# Altium PCB PCB2.PcbDoc
Units mil, origin at the board's own origin, x right, y up, seen from the top; angles counter-clockwise.
Board outline 1566.93 x 1488.19 mil, 4 copper layers (Top Layer, Int1 (GND), Int2 (PWR), Bottom Layer), stack 62.449 mil thick; 29 components, 72 nets, 189 pads, 109 vias.
Unrouted connection lines stored in the file: 2.
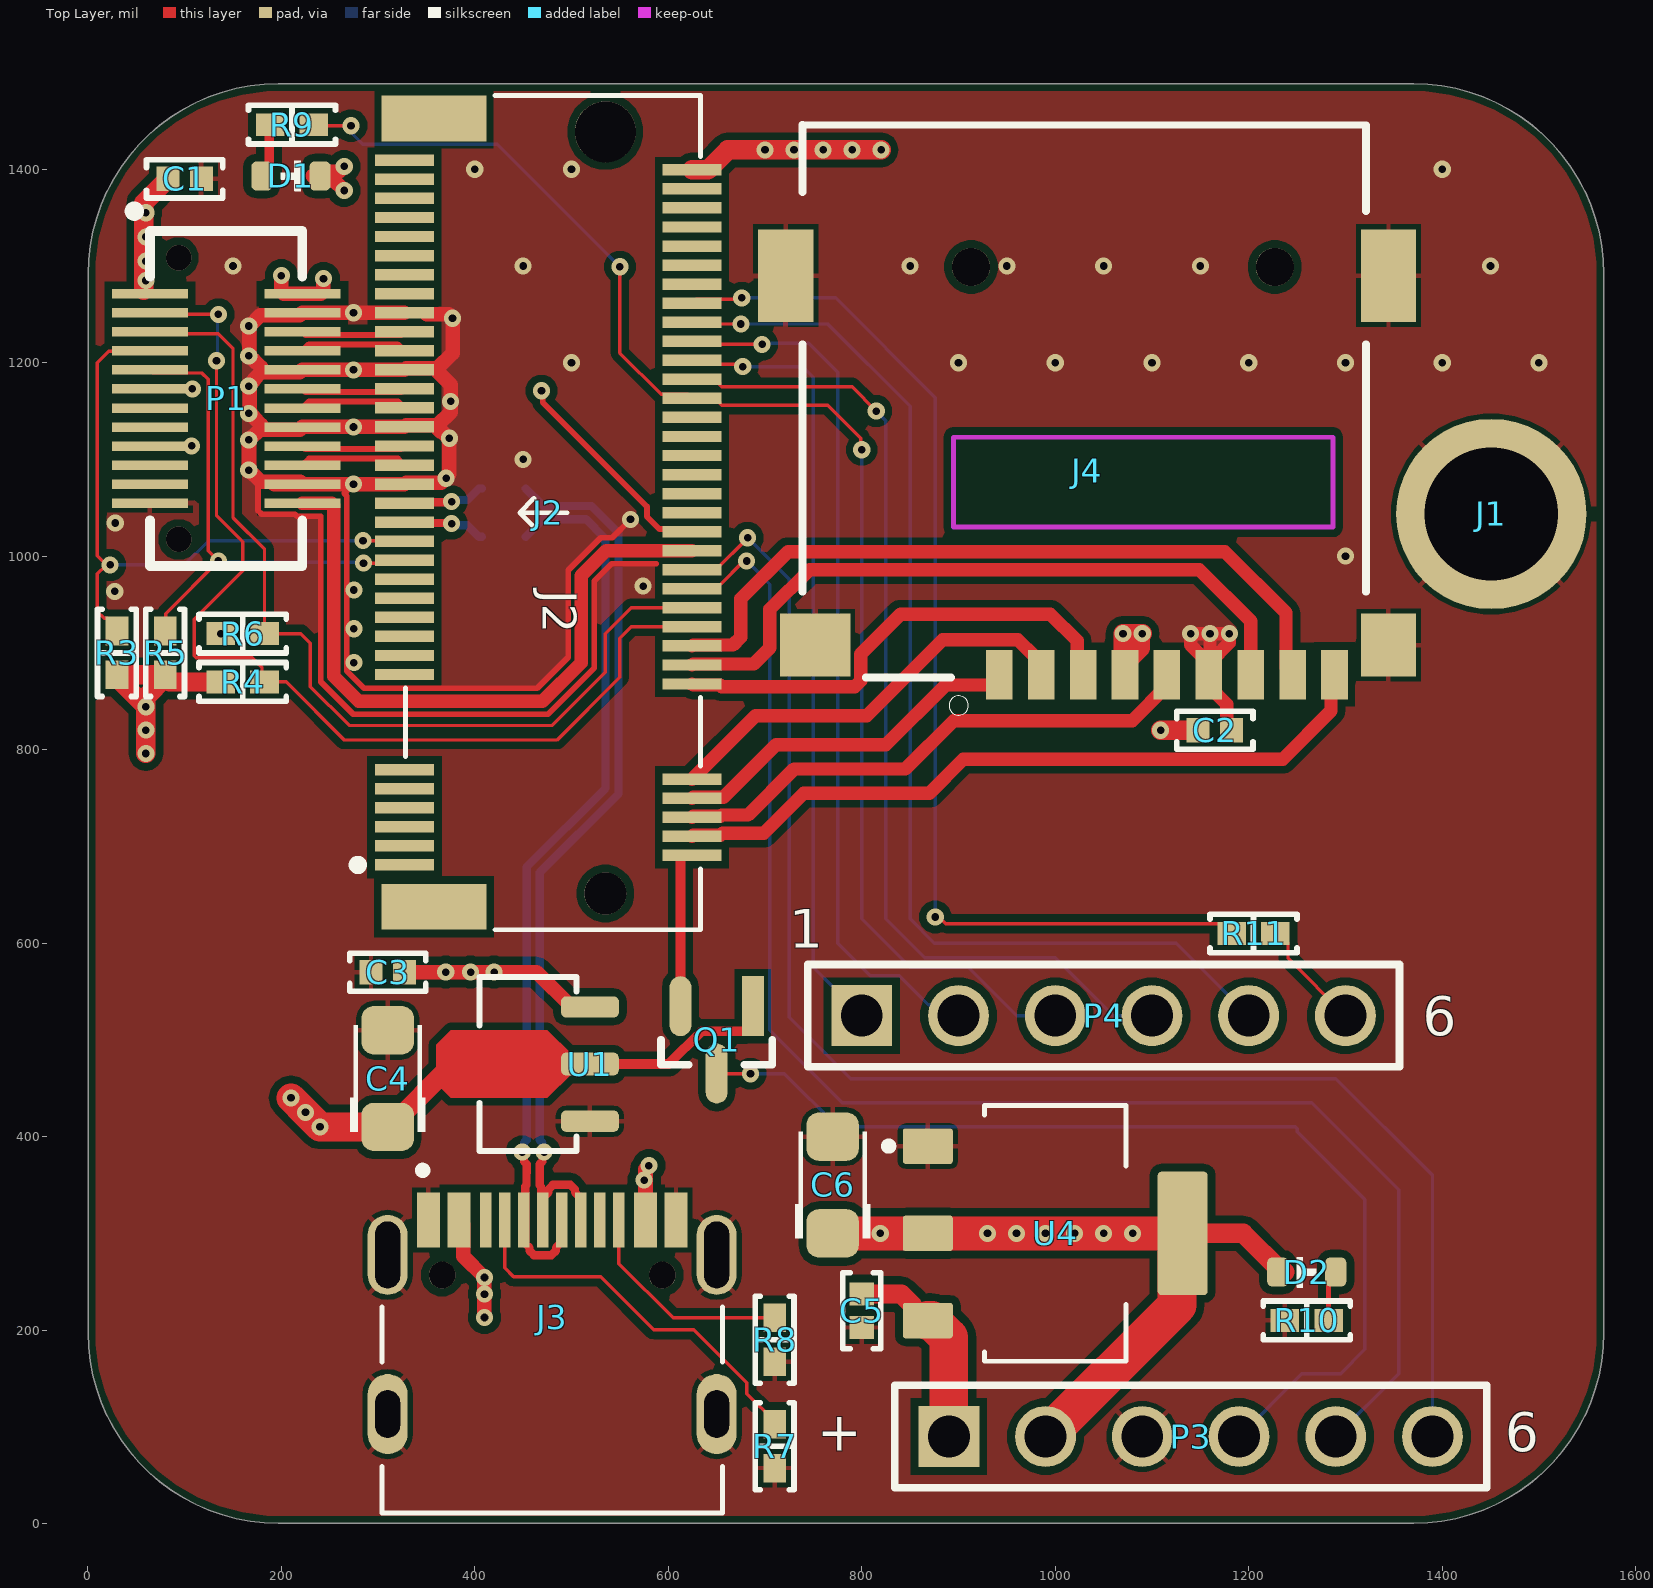
[diagram p0: Top Layer view]
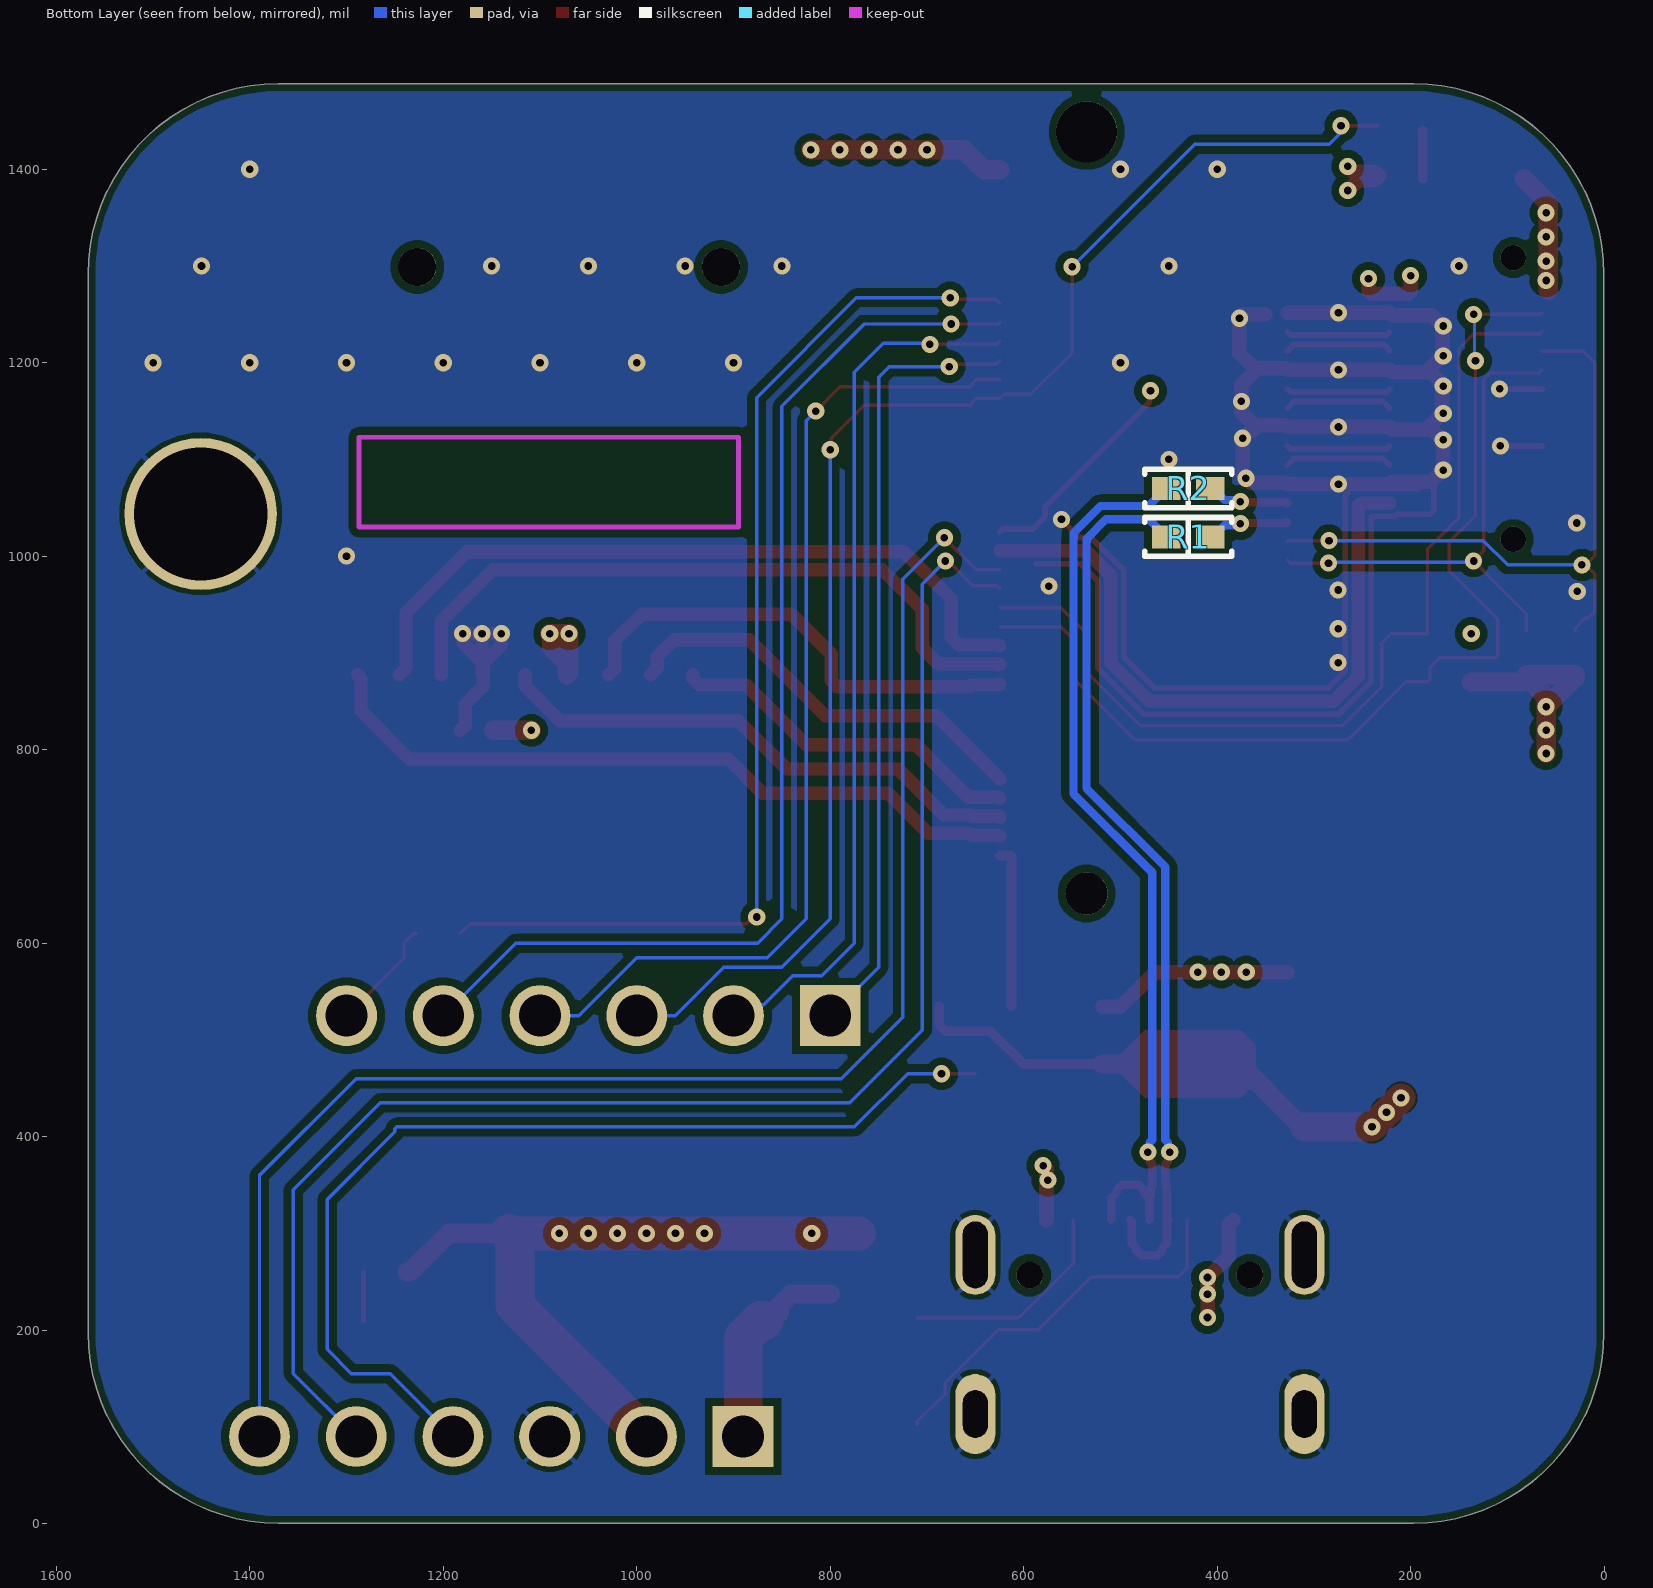
[diagram p1: Bottom Layer view, seen from below]
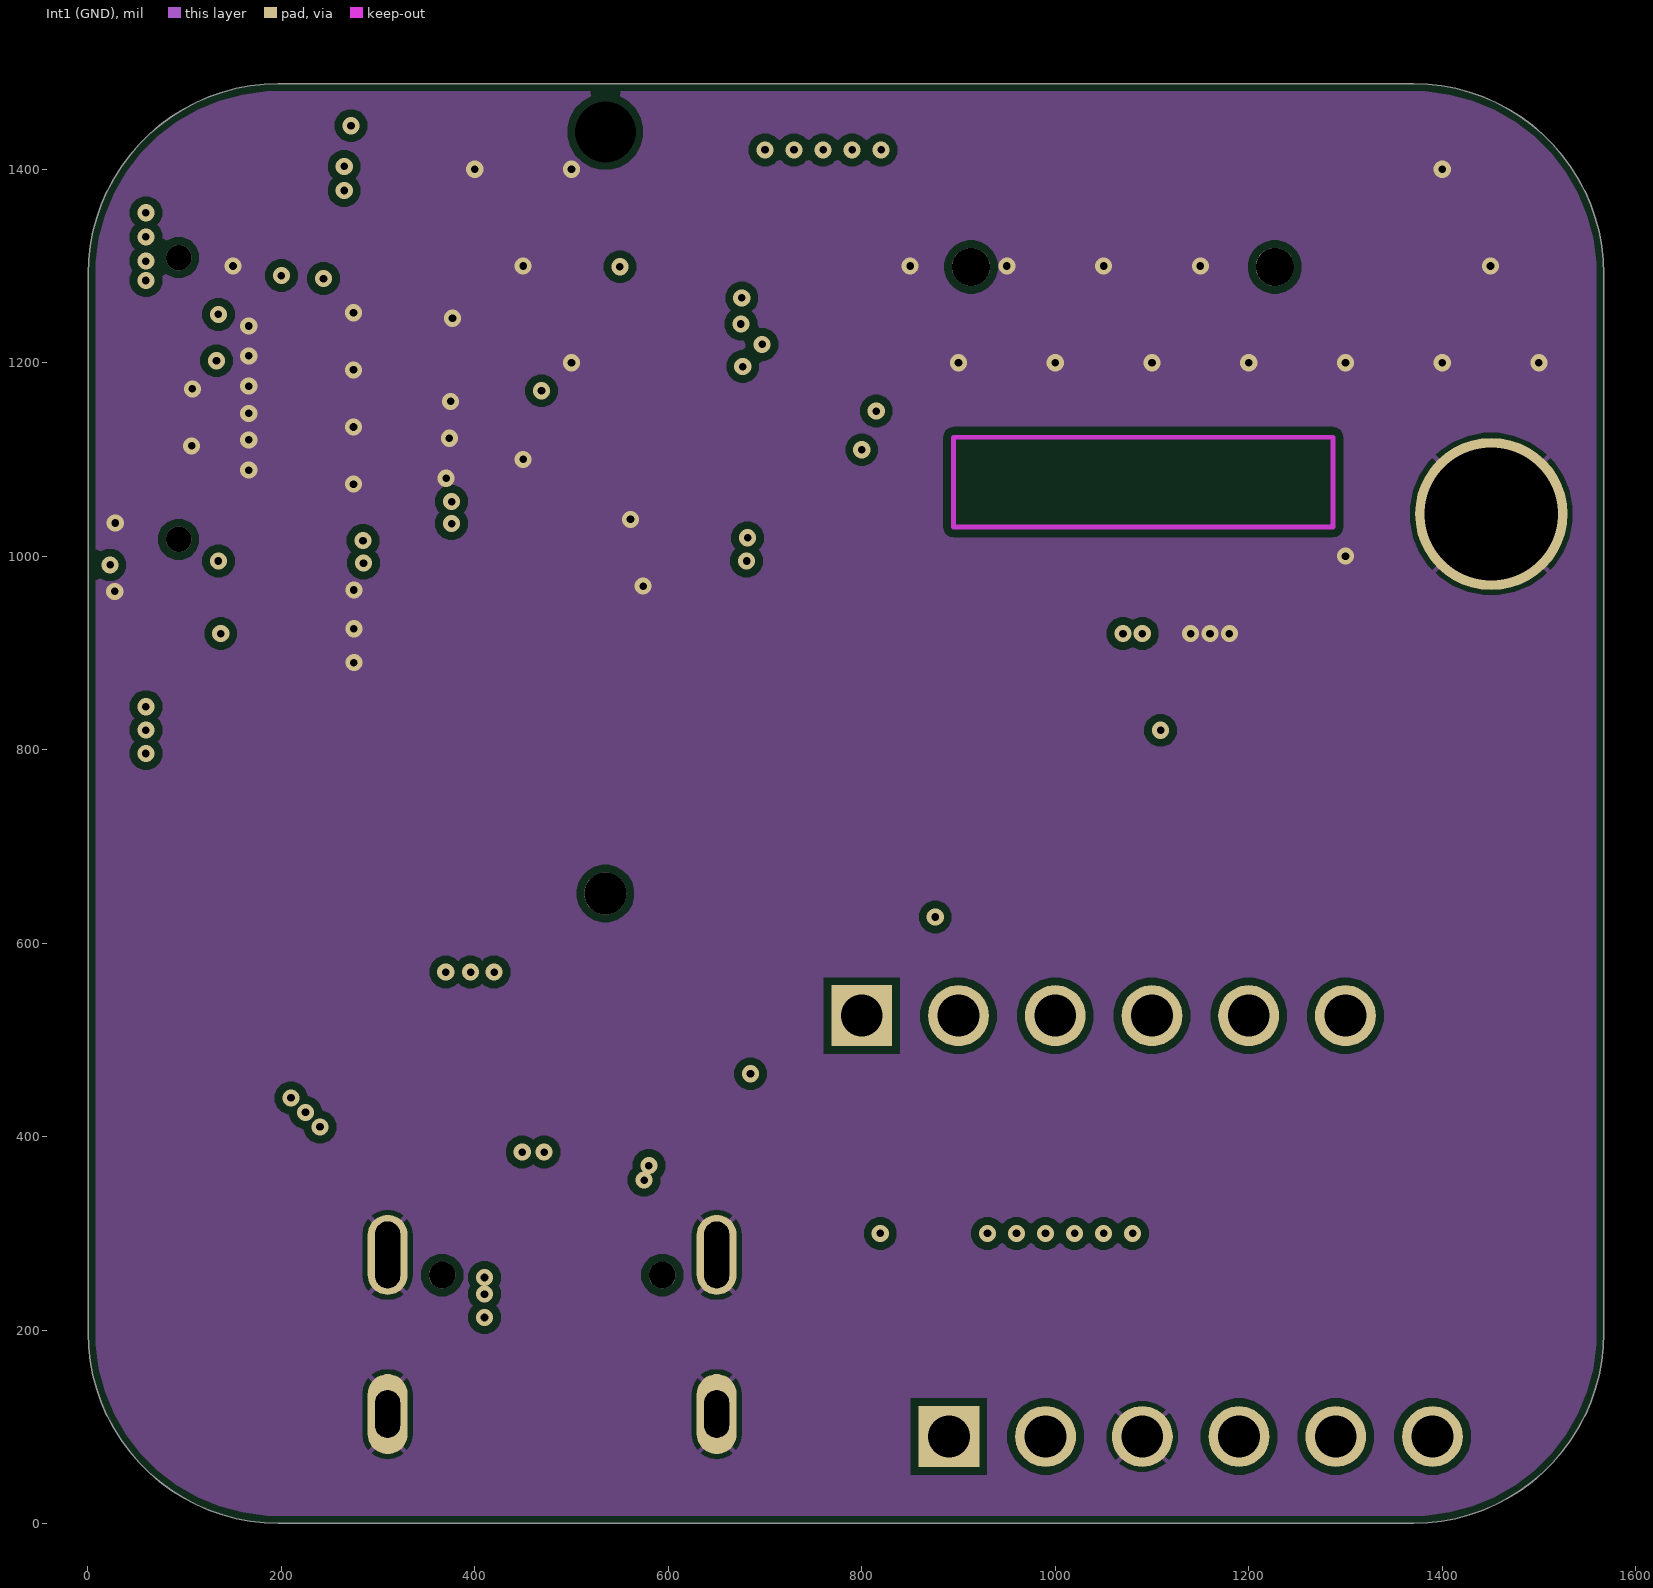
[diagram p2: Int1 (GND)]
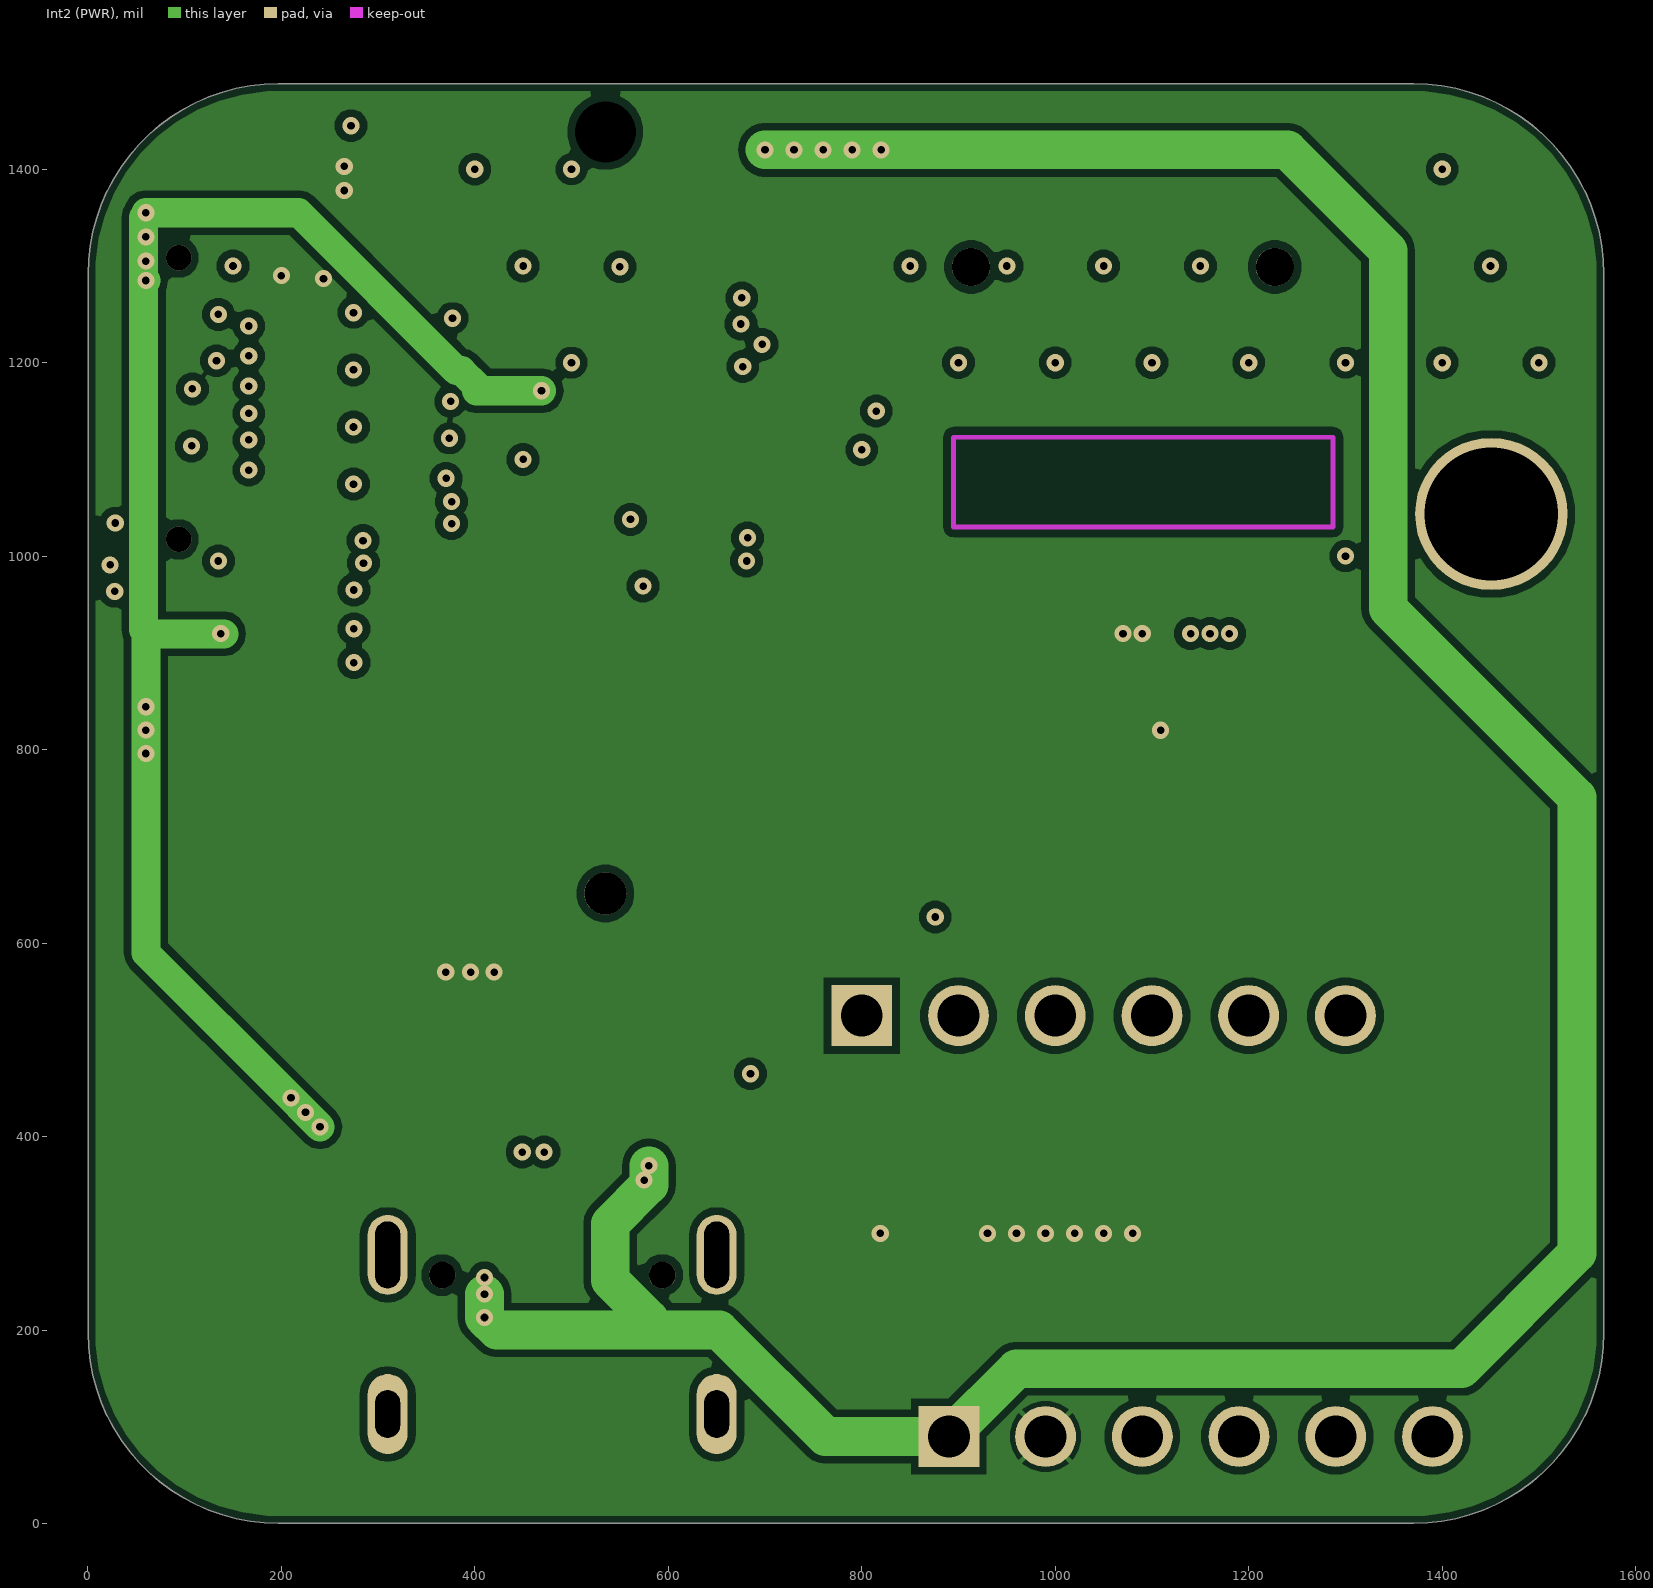
[diagram p3: Int2 (PWR)]

## Layer stack, top to bottom
Top Solder: solder mask 0.6, SM-001, Dk 3.8
Top Layer: signal copper 1.378
Dielectric 1: prepreg 8.284, PP-017, Dk 4.5
Int1 (GND): signal copper 0.598
Dielectric 2: core 41.929, Core-039, Dk 4.48
Int2 (PWR): signal copper 0.598
Dielectric 3: prepreg 8.284, PP-017, Dk 4.5
Bottom Layer: signal copper 1.378
Bottom Solder: solder mask 0.6, SM-001, Dk 3.8

## Board outline
0.25,197.1 0.25,1291.59 cw(c197.1,1291.59) 197.1,1488.44 1370.33,1488.44 cw(c1370.33,1291.59) 1567.18,1291.59 1567.18,197.1 cw(c1370.33,197.1) 1370.33,0.25 197.1,0.25 cw(c197.1,197.1)

## Design rules (kind name [scope] priority, off if disabled: settings)
BoardOutlineClearance [All] p1: gap=7.87 ignorepadtopadclearanceinfootprint=FALSE except(15.75: Arc-SplitBarrior Arc-SplitContinuation Track-SplitBarrior Track-SplitContinuation SMDPad-SplitBarrior SMDPad-SplitContinuation THPad-SplitBarrior THPad-SplitContinuation Via-SplitBarrior Via-SplitContinuation Fill-SplitBarrior Fill-SplitContinuation Poly-SplitBarrior Poly-SplitContinuation Region-SplitBarrior Region-SplitContinuation Text-SplitBarrior Text-SplitContinuation)
Clearance [All] p1: gap=7.87 ignorepadtopadclearanceinfootprint=FALSE except(0: Arc-Text Track-Text SMDPad-Text THPad-Text Via-Text Fill-Text Poly-Text Region-Text Text-Text; 3.5: Arc-Arc Arc-Track Arc-SMDPad Track-Track Track-SMDPad SMDPad-SMDPad; 5: Arc-Via Track-Via SMDPad-Via THPad-Via Via-Via)
DiffPairsRouting USB [InDifferentialPairClass('USB')] p1: maxlimit=5 minlimit=5 mostfreqgap=5 toplayer_minwidth=8.56 toplayer_maxwidth=8.56 toplayer_prefwidth=8.56 midlayer1_minwidth=6.05 midlayer1_maxwidth=6.05 midlayer1_prefwidth=6.05 midlayer2_minwidth=6.05 midlayer2_maxwidth=6.05 midlayer2_prefwidth=6.05 bottomlayer_minwidth=8.56 bottomlayer_maxwidth=8.56 bottomlayer_prefwidth=8.56 impedanceprofiledriven=TRUE impedanceprofileid={9F585168-AD37-4EB0-BCD7-389F9EE76906} impedanceprofilevalue=90.000000 maxuncoupledlength=500
DiffPairsRouting MIPI [InDifferentialPairClass('MIPI')] p2: maxlimit=5 minlimit=5 mostfreqgap=5 toplayer_minwidth=6.2 toplayer_maxwidth=6.2 toplayer_prefwidth=6.2 midlayer1_minwidth=4.33 midlayer1_maxwidth=4.33 midlayer1_prefwidth=4.33 midlayer2_minwidth=4.33 midlayer2_maxwidth=4.33 midlayer2_prefwidth=4.33 bottomlayer_minwidth=6.2 bottomlayer_maxwidth=6.2 bottomlayer_prefwidth=6.2 impedanceprofiledriven=TRUE impedanceprofileid={22BA7DF4-EF47-42FE-BF8E-29151FD2DEE7} impedanceprofilevalue=100.000000 maxuncoupledlength=500
HoleSize [All] p1: absolutevalues=TRUE maxlimit=248.03 minlimit=7.87 maxpercent=80.000 minpercent=20.000
MinimumSolderMaskSliver [All] p1: minsoldermaskwidth=3.94
PlaneClearance [All] p1: clearance=5
PlaneConnect [All] p1: pad.planeconnectstyle=Relief pad.reliefexpansion=5 pad.reliefentries=4 pad.reliefconductorwidth=5 pad.reliefairgap=5 via.planeconnectstyle=Direct via.reliefexpansion=20 via.reliefentries=4 via.reliefconductorwidth=10 via.reliefairgap=10
PolygonConnect [All] p1: thpad.connectstyle=Relief thpad.reliefconductorwidth=5 thpad.reliefentries=4 thpad.polygonreliefangle="45 Angle" thpad.airgapwidth=5 smdpad.connectstyle=Relief smdpad.reliefconductorwidth=5 smdpad.reliefentries=4 smdpad.polygonreliefangle="90 Angle" smdpad.airgapwidth=5 via.connectstyle=Direct via.reliefconductorwidth=10 via.reliefentries=4 via.polygonreliefangle="90 Angle" via.airgapwidth=10
RoutingVias [All] p1: holewidth=7.87 width=11.81 viastyle="Through Hole" minholewidth=7.87 minwidth=11.81 maxholewidth=39.37 maxwidth=78.74 useviatemplates=TRUE viatemplateguid#1={F701D0FB-8AA5-4961-8F3C-595B0EFB5A3B} viatemplatename#1=v45h20m0mx0(Tol13-8)
SilkToSilkClearance [All] p1: silktosilkclearance=5.91
SolderMaskExpansion [All] p1: expansion=4 istentingtop=FALSE
Width SD_CARD [InNetClass('SD_CARD')] p1: maxlimit=13.83 minlimit=10.58 preferedwidth=13.83 toplayer_minwidth=13.83 midlayer1_maxwidth=10.58 midlayer1_prefwidth=10.58 midlayer2_maxwidth=10.58 midlayer2_prefwidth=10.58 bottomlayer_minwidth=13.83 impedanceprofiledriven=TRUE impedanceprofileid={35FAC506-6B7D-4156-9A2B-B5BB23B133E3} impedanceprofilevalue=50.000000 minimp=50.000000 maximp=50.000000 favimp=50.000000
Width MIPI_CLK [InNet('MCSI-MCLK')] p2: maxlimit=13.83 minlimit=10.58 preferedwidth=13.83 toplayer_minwidth=13.83 midlayer1_maxwidth=10.58 midlayer1_prefwidth=10.58 midlayer2_maxwidth=10.58 midlayer2_prefwidth=10.58 bottomlayer_minwidth=13.83 impedanceprofiledriven=TRUE impedanceprofileid={A6AE610F-273C-4D2F-8FC4-F4028CCF98C5} impedanceprofilevalue=50.000000 minimp=50.000000 maximp=50.000000 favimp=50.000000
Width [All] p3: maxlimit=100 minlimit=3.5 preferedwidth=3.5
24 further rules are at their usual default settings.

## Classes and differential pairs
net class SD_CARD: PF0 PF1 PF2 PF3 PF4 PF5 PF6
differential pair class USB: USB0 USB0_
differential pair class MIPI: MCSI-CK MCSI-D0 MCSI-D1
differential pair USB0: +USB0_P -USB0_N
differential pair USB0_: +USB0__P -USB0__N
differential pair MCSI-D1: +MCSI-D1_P -MCSI-D1_N
differential pair MCSI-D0: +MCSI-D0_P -MCSI-D0_N
differential pair MCSI-CK: +MCSI-CK_P -MCSI-CK_N

## Components (designator, comment, footprint, x,y, rotation, side; value= is the part's Value field where it differs from the comment)
C1 "10 µF" "CAP 0402_1005" 100,1390 r0 top
C2 "10 µF" "CAP 0402_1005" 1165,820 r0 top
C3 "10 µF" "CAP 0402_1005" 310,570 r180 top
C4 "22 µF" CAP_TAN_A1206 310,460 r90 top
C5 "10 µF" "CAP 0402_1005" 800,220 r270 top
C6 "22 µF" CAP_TAN_A1206 770,350 r90 top
D1 "Green" LED_0603_GREEN 210,1393 r180 top
D2 "Red" LED_0603_RED 1260,260 r0 top
J1 "Socket" "M.2 SMT-FEMALE - FULL" 1450.74,1043.62 r270 top
J2 "NGFF-67P_B-KEY座子 4.2H高" M2-67P0R50_B_FEMALE 535,1045 r90 top locked
J3 "TYPE-C-31-M-12" HRO_TYPE-C-31-M-12 480,113.19 r0 top locked
J4 "TF-01A" TF-01A 1030,1160 r180 top locked
P1 "CAMERA_BTB" F_24PIN 143,1163 r0 top locked
P3 "61300611121" 61300611121 1140,90 r0 top
P4 "61300611121" 61300611121 1050,525 r0 top locked
Q1 "SI2302" FP-S-03946-IPC_B 650,500 r270 top
R1 "22 Ohms" "RES 0402_1005" 430,1020 r0 bottom
R2 "22 Ohms" "RES 0402_1005" 430,1070 r0 bottom
R3 "1.5 kOhms" "RES 0402_1005" 30,900 r90 top
R4 "10 kOhms" "RES 0402_1005" 160,870 r0 top
R5 "1.5 kOhms" "RES 0402_1005" 80,900 r90 top
R6 "10 kOhms" "RES 0402_1005" 160,920 r0 top
R7 "5.1 kOhms" "RES 0402_1005" 710,80 r90 top
R8 "5.1 kOhms" "RES 0402_1005" 710,190 r90 top
R9 "10 kOhms" "RES 0402_1005" 211,1446 r0 top
R10 "10 kOhms" "RES 0402_1005" 1260,210 r180 top
R11 "1 kOhms" "RES 0402_1005" 1205,610 r0 top
U1 "AMS1117-1.8" SOT89-3 455,475 r180 top
U4 "AMS1117-3.3" SOT229P700X180-4N 1000,300 r270 top

## Footprints (in the part's own frame and the unit in brackets; to place one, negate y for a bottom-side part, rotate by r counter-clockwise, add the part's x,y. Pads: shape width x height; smd on the part's side, far side on the other; paste and mask are expansions set on the pad)
61300611121 [mm] "Pin Header, pitch 2.54 mm, THT, Vertical, single row, 6p"
  rect 1.6x1.6 hole 1.1: 1(-6.35,0)
  round 1.6 hole 1.1: 2(-3.81,0) 3(-1.27,0) 4(1.27,0) 5(3.81,0) 6(6.35,0)
  silkscreen extent -7.77,-1.35 7.77,1.35, body extent -7.62,-1.27 7.62,1.27, height 8.57
"CAP 0402_1005" [mm] "Chip Capacitor, 2-Leads, Body 1.02x0.51mm, IPC Medium Density"
  rect 0.6x0.64 smd: 1(-0.44,0) 2(0.44,0)
  silkscreen extent -1,-0.5 1,0.5, body extent -0.5,-0.26 0.5,0.26, height 0.52
CAP_TAN_A1206 [mil]
  rrect50% 50x54 smd: 1(-50,0) 2(50,0)
  silkscreen extent -55,-39 55,39, body extent -63,-31 63,32, height 71
F_24PIN [mm] "0.5双槽板对板母座，24P"
  rect 2x0.25 smd: 1(-2,2.75) 2(-2,2.25) 3(-2,1.75) 4(-2,1.25) 5(-2,0.75) 6(-2,0.25) 7(-2,-0.25) 8(-2,-0.75) 9(-2,-1.25) 10(-2,-1.75) 11(-2,-2.25) 12(-2,-2.75) 13(2,-2.75) 14(2,-2.25) 15(2,-1.75) 16(2,-1.25) 17(2,-0.75) 18(2,-0.25) 19(2,0.25) 20(2,0.75) 21(2,1.25) 22(2,1.75) 23(2,2.25) 24(2,2.75)
  silkscreen extent -2.54,-4.4 2,5.04
FP-S-03946-IPC_B [mm]
  rect 1.574x0.576 smd paste+0 mask+0: 1(-0.885,0.95)
  rrect100% 1.574x0.576 smd paste+0 mask+0: 2(-0.885,-0.95) 3(0.885,0)
  silkscreen extent 0,-1.46 0.65,1.46, body extent -1.92,-1.71 1.92,1.71, height 0.25
HRO_TYPE-C-31-M-12 [mm]
  rect 0.6x1.45 smd: A1B12(-3.25,5.095) A4B9(-2.45,5.095) B1A12(3.25,5.095) B4A9(2.45,5.095)
  rect 0.3x1.45 smd: A5(-1.25,5.095) A6(-0.25,5.095) A7(0.25,5.095) A8(1.25,5.095) B5(1.75,5.095) B6(0.75,5.095) B7(-0.75,5.095) B8(-1.75,5.095)
  oval 1.05x2.1 hole 0.65 slot 1.75 at 90 deg: S1(-4.32,4.18) S2(4.32,4.18)
  oval 1.05x2.1 hole 0.65 slot 1.25 at 90 deg: S3(-4.32,0) S4(4.32,0)
  round 0.7 hole 0.7 unplated: ""(-2.89,3.65) ""(2.89,3.65)
  silkscreen extent -4.47,-2.6 4.47,6.5, body extent -4.47,-2.6 4.47,5.31, height 3.31
LED_0603_GREEN [mil]
  rrect50% 22x30 smd: 1(-30,0) 2(30,0)
  silkscreen extent -10,-16 10,16, body extent -32,-16 32,16, height 24
LED_0603_RED [mil]
  rrect50% 22x30 smd: 1(-30,0) 2(30,0)
  silkscreen extent -10,-16 10,16, body extent -32,-16 32,16, height 24
M2-67P0R50_B_FEMALE [mm]
  rect 0.3x1.55 smd mask+0.051: 1(-9.25,5.275) 2(-9,-2.275) 3(-8.75,5.275) 4(-8.5,-2.275) 5(-8.25,5.275) 6(-8,-2.275) 7(-7.75,5.275) 8(-7.5,-2.275) 9(-7.25,5.275) 10(-7,-2.275) 11(-6.75,5.275) 20(-4.5,-2.275) 21(-4.25,5.275) 22(-4,-2.275) 23(-3.75,5.275) 24(-3.5,-2.275) 25(-3.25,5.275) 26(-3,-2.275) 27(-2.75,5.275) 28(-2.5,-2.275) 29(-2.25,5.275) 30(-2,-2.275) 31(-1.75,5.275) 32(-1.5,-2.275) 33(-1.25,5.275) 34(-1,-2.275) 35(-0.75,5.275) 36(-0.5,-2.275) 37(-0.25,5.275) 38(0,-2.275) 39(0.25,5.275) 40(0.5,-2.275) 41(0.75,5.275) 42(1,-2.275) 43(1.25,5.275) 44(1.5,-2.275) 45(1.75,5.275) 46(2,-2.275) 47(2.25,5.275) 48(2.5,-2.275) 49(2.75,5.275) 50(3,-2.275) 51(3.25,5.275) 52(3.5,-2.275) 53(3.75,5.275) 54(4,-2.275) 55(4.25,5.275) 56(4.5,-2.275) 57(4.75,5.275) 58(5,-2.275) 59(5.25,5.275) 60(5.5,-2.275) 61(5.75,5.275) 62(6,-2.275) 63(6.25,5.275) 64(6.5,-2.275) 65(6.75,5.275) 66(7,-2.275) 67(7.25,5.275) 68(7.5,-2.275) 69(7.75,5.275) 70(8,-2.275) 71(8.25,5.275) 72(8.5,-2.275) 73(8.75,5.275) 74(9,-2.275) 75(9.25,5.275)
  round 1.1 hole 1.1 mask+0.051: " "(-10,0)
  round 1.6 / inner round 1.524 / far side round 1.6 hole 1.6 mask+0.051: " "(10,0)
  rect 1.2x2.75 smd mask+0.051: SH1(-10.35,4.5) SH2(10.35,4.5)
  silkscreen extent -10.95,-2.5 10.95,6.62, body extent -10.95,-2.85 10.95,5.85, height 4.09
"M.2 SMT-FEMALE - FULL" [mm] "Connector; Plug"
  round 5 / inner round 4 / far side round 4 hole 3.5 paste+0 mask+0.051: 1(0,0)
  body extent -2.26,-2.24 2.24,2.26, height 2.46
"RES 0402_1005" [mm] "Chip Resistor, 2-Leads, Body 1.0x0.5mm, IPC Medium Density"
  rect 0.75x0.6 smd: 1(-0.575,0) 2(0.575,0)
  silkscreen extent -1.14,-0.51 1.14,0.51, body extent -0.5,-0.25 0.5,0.25, height 0.35
SOT89-3 [mil]
  rrect50% 60x22 smd: 1(-64,59.06) 3(-64,-59.06)
  rrect50% 60x24 smd: 2(-64,0)
  Top Layer region: -45,10 -20,35 80,35 95,20 95,-20 80,-35 -20,-35 -45,-10
  silkscreen extent -50,-90 50,90, body extent -83,-88 75,88, height 60
SOT229P700X180-4N [mm]
  rrect15% 0.93x1.31 smd: 1(-2.29,-3.345) 2(0,-3.345) 3(2.29,-3.345)
  rrect15% 3.24x1.31 smd: 4(0,3.345)
  silkscreen extent -3.36,-4.47 3.36,1.86, body extent -3.25,-3.5 3.25,3.5, height 1.78
TF-01A [mm]
  rect 0.7x1.3 smd: 1(2.23,7.174) 2(1.13,7.174) 3(0.03,7.174) 4(-1.07,7.174) 5(-2.17,7.174) 6(-3.27,7.174) 7(-4.37,7.174) 8(-5.47,7.174) CD1(-6.57,7.174)
  rect 1.448x1.651 smd: MP1(-7.989,6.4)
  rect 1.448x2.438 smd: MP2(-7.989,-3.3) MP3(7.836,-3.3)
  rect 1.854x1.651 smd: MP4(7.061,6.4)
  round 1 hole 1 unplated: ""(-5.004,-3.531) ""(2.972,-3.531)
  Keep-Out Layer lines w0.127: 3.429,3.302 3.429,0.94 -6.528,0.94 -6.528,3.302 3.429,3.302
  silkscreen extent -7.4,-7.26 7.4,8.24, body extent -8.07,-7.69 8.03,7.51, height 2

## Part data
C1 C2 C3 C5: library part GRM155R60E106ME16D, "CAP CER 10UF 2.5V X5R 0402", Device Package="0402 (1005 Metric)", manufacturer="Murata Electronics", Operating Temperature="-55°C ~ 85°C", Supplier Part Number 1=490-10692-1-ND, Temperature Coefficient=X5R, Tolerance=±20%, Voltage - Rated=2.5V, Applications="General Purpose", Capacitance="10 µF", componentlink1description=Datasheet, componentlink1url=https://search.murata.co.jp/Ceramy/image/img/A01X/G101/ENG/GRM155R60E106ME16-01.pdf, componentlink2description="DigiKey Link", componentlink2url=https://www.digikey.com/en/products/detail/murata-electronics/GRM155R60E106ME16D/4905100, lastupdated="2022/9/14 7:46:00", Lifecycle Status=Active, Minimum Order=1, Mounting Type="Surface Mount, MLCC", Package / Case="0402 (1005 Metric)", packaging=TapeAndReel, Part Number=GRM155R60E106ME16D, Part Status=Active, partid=6704, Price=0.02, series=GRM, Size / Dimension="0.039\" L x 0.020\" W (1.00mm x 0.50mm)", Supplier 1=DigiKey, Thickness (Max)="0.028\" (0.70mm)"
C4 C6: library part GRM155R60E106ME16D, "CAP CER 10UF 2.5V X5R 0402", Capacitance="10 µF", Device Package="0402 (1005 Metric)", manufacturer="Murata Electronics", Operating Temperature="-55°C ~ 85°C", Supplier Part Number 1=490-10692-1-ND, Temperature Coefficient=X5R, Tolerance=±20%, Voltage - Rated=2.5V, Applications="General Purpose", componentlink1description=Datasheet, componentlink1url=https://search.murata.co.jp/Ceramy/image/img/A01X/G101/ENG/GRM155R60E106ME16-01.pdf, componentlink2description="DigiKey Link", componentlink2url=https://www.digikey.com/en/products/detail/murata-electronics/GRM155R60E106ME16D/4905100, lastupdated="2022/9/14 7:46:00", Lifecycle Status=Active, Minimum Order=1, Mounting Type="Surface Mount, MLCC", Package / Case="0402 (1005 Metric)", packaging=TapeAndReel, Part Number=GRM155R60E106ME16D, Part Status=Active, partid=6704, Price=0.02, series=GRM, Size / Dimension="0.039\" L x 0.020\" W (1.00mm x 0.50mm)", Supplier 1=DigiKey, Thickness (Max)="0.028\" (0.70mm)"
D1: library part EAST10052GA0, "LED GREEN CLEAR 2SMD", Current - Test=5mA, Device Package="0402 (1005 Metric)", Lens Color=Colorless, manufacturer="Everlight Electronics Co Ltd", Supplier Device Package=2-SMD, Supplier Part Number 1=1080-1557-1-ND, Voltage - Forward (Vf) (Typ)=2.95V, Color=Green, componentlink1description=Datasheet, componentlink1url=https://everlightamericas.com/index.php?controller=attachment&id_attachment=3256, componentlink2description="DigiKey Link", componentlink2url=https://www.digikey.com/en/products/detail/everlight-electronics-co-ltd/EAST10052GA0/8510366, Configuration=Standard, Height (Max)=0.25mm, lastupdated="2022/9/14 8:36:15", Lens Size="1.00mm x 0.50mm", Lens Style="Rectangle with Flat Top", Lens Transparency=Clear, Lifecycle Status=Active, Minimum Order=1, Mounting Type="Surface Mount", Package / Case="0402 (1005 Metric)", packaging=TapeAndReel, Part Number=EAST10052GA0, Part Status=Active, partid=696, Price=0.06, series=-, Size / Dimension="1.00mm L x 0.50mm W", Supplier 1=DigiKey, Viewing Angle=120°, Wavelength - Peak=518nm
D2: library part QBLP595-R-2897, "0402 LED RED, CLEAR LENS, 330MCD", Current - Test=20mA, Device Package="0402 (1005 Metric)", Lens Color=Colorless, manufacturer="QT Brightek (QTB)", Millicandela Rating=330mcd, Supplier Device Package=0402, Supplier Part Number 1=1516-QBLP595-R-2897CT-ND, Voltage - Forward (Vf) (Typ)=2.1V, Color=Red, componentlink1description=Datasheet, componentlink1url=https://www.qt-brightek.com/datasheet/QBLP595-R-2897.pdf, componentlink2description="DigiKey Link", componentlink2url=https://www.digikey.com/en/products/detail/qt-brightek-qtb/QBLP595-R-2897/16499677, Configuration=Standard, Height (Max)=0.60mm, lastupdated="2022/9/14 8:36:36", Lens Size="0.70mm x 0.50mm", Lens Style="Rectangle with Flat Top", Lens Transparency=Clear, Lifecycle Status=Active, Minimum Order=1, Mounting Type="Surface Mount", Package / Case="0402 (1005 Metric)", packaging=TapeAndReel, Part Number=QBLP595-R-2897, Part Status=Active, partid=1086, Price=0.07, series=QBLP595, Size / Dimension="1.00mm L x 0.50mm W", Supplier 1=DigiKey, Viewing Angle=120°, Wavelength - Dominant=620nm
J2: library part NGFF-67P_B-MALE
J3: "USB Connectors 24 Receptacle 1 8.94*7.3mm RoHS", Package=None, Availability=Unavailable, MF="{'manufacturer': u'HRO Electronics Co., Ltd.'}", MP=TYPE-C-31-M-12, Price=None
J4: "<b>Connector - Card Sockets 8 1.1mm SMD RoHS</b><p> Source: <a href=\"https://datasheet.lcsc.com/szlcsc/1903221101_Korean-Hroparts-Elec-TF-01A_C91145.pdf\"> Datasheet </a>", Package=None, Availability=Unavailable, MF="{'manufacturer': u'HRO Electronics Co., Ltd.'}", MP=TF-01A, Price=None
P1: library part "Header 12X2A", "Header, 12-Pin, Dual row", LatestRevisionDate=17-Jul-2002, LatestRevisionNote="Re-released for DXP Platform.", Publisher="Altium Limited"
P3 P4: library part CMP-1502-01070-1, "THT Vertical Pin Header WR-PHD, Pitch 2.54 mm, Single Row, 6 pins", Contact Resistance=20mOhm, manufacturer="Wurth Elektronik", Operating Temperature=-40to105degC, Rated Current=3A, Withstanding Voltage=500VAC, Working Voltage=250VAC, Datasheet URL=https://katalog.we-online.de/em/datasheet/6130xx11121.pdf, Gender=Male, Manufacturer URL=http://www.we-online.de, Mounting Technology=THT, Orientation=Vertical, Package Reference=61300611121, packaging=Bag, Part Number=61300611121, Pin Number=6, Pitch=2.54mm, Publisher=WurthElektronik, Row Number=Single
Q1: library part CMP-02550-000243-1, "MOSFET N-CH 20V 2.9A SOT23-3", Case/Package=SOT-23, Continuous Drain Current (ID)=2.6A, Drain to Source Resistance=57mR, Drain to Source Voltage (Vdss)=20V, Gate to Source Voltage (Vgs)=8V, Max Operating Temperature=150°C, Max Power Dissipation=710mW, Min Operating Temperature=-55°C, Package Quantity=3000, Fall Time=7ns, Lead Free="Lead Free", Mount="Surface Mount", Number of Channels=1, Number of Elements=1, Number of Pins=3, packaging="Tape and Reel", Power Dissipation=710mW, REACH SVHC="No SVHC", Rise Time=7ns, RoHS Compliant=Yes, Turn-Off Delay Time=30ns, Turn-On Delay Time=8ns, Weight=0.050717oz
R1 R2: library part SR0402FR-7W22RL, "RES 22 OHM 1% 1/8W 0402", Device Package="0402 (1005 Metric)", manufacturer=Yageo, Operating Temperature="-55°C ~ 155°C", Power (Watts)="0.125W, 1/8W", Ratings=AEC-Q200, Supplier Device Package=0402, Supplier Part Number 1=YAG5820CT-ND, Temperature Coefficient=±100ppm/°C, Tolerance=±1%, componentlink1description=Datasheet, componentlink1url=http://www.yageo.com/documents/recent/PYu-SR_D_F%20tol_RoHS_L_4.pdf, componentlink2description="DigiKey Link", componentlink2url=https://www.digikey.com/en/products/detail/yageo/SR0402FR-7W22RL/9373094, Composition="Thick Film", Features="Automotive AEC-Q200, Pulse Withstanding", Height - Seated (Max)="0.016\" (0.40mm)", lastupdated="2022/9/14 8:02:27", Lifecycle Status=Active, Minimum Order=1, Number of Terminations=2, Package / Case="0402 (1005 Metric)", packaging=TapeAndReel, Part Number=SR0402FR-7W22RL, Part Status=Active, partid=4390, Price=0.07, Resistance="22 Ohms", series=SR, Size / Dimension="0.039\" L x 0.020\" W (1.00mm x 0.50mm)", Supplier 1=DigiKey
R3 R5: library part PTN0402Y1501BST1, "PTN0402 10PPM 1.5K 0.1% S T1 E1", Device Package="0402 (1005 Metric)", manufacturer="Vishay Dale Thin Film", Operating Temperature="-55°C ~ 155°C", Power (Watts)="0.05W, 1/20W", Supplier Device Package=0402, Supplier Part Number 1=764-PTN0402Y1501BST1CT-ND, Temperature Coefficient=±10ppm/°C, Tolerance=±0.1%, componentlink1description=Datasheet, componentlink1url=https://www.vishay.com/docs/60026/ptn.pdf, componentlink2description="DigiKey Link", componentlink2url=https://www.digikey.com/en/products/detail/vishay-dale-thin-film/PTN0402Y1501BST1/12820654, Composition="Thin Film", Features="Anti-Sulfur, Moisture Resistant, Non-Inductive", Height - Seated (Max)="0.033\" (0.84mm)", lastupdated="2022/9/14 8:01:19", Lifecycle Status=Active, Minimum Order=1, Number of Terminations=2, Package / Case="0402 (1005 Metric)", packaging=TapeAndReel, Part Number=PTN0402Y1501BST1, Part Status=Active, partid=59552, Price=0.27, Resistance="1.5 kOhms", series=PTN, Size / Dimension="0.042\" L x 0.022\" W (1.07mm x 0.56mm)", Supplier 1=DigiKey
R4 R6: library part P2TC0402D1002LNTA, "P2TC0402 2PPM/C 10K 0,01% N TA", Device Package="0402 (1005 Metric)", manufacturer="Vishay Sfernice", Operating Temperature="-55°C ~ 155°C", Power (Watts)="0.063W, 1/16W", Supplier Device Package=0402, Supplier Part Number 1=716-P2TC0402D1002LNTACT-ND, Temperature Coefficient=±2ppm/°C, Tolerance=±0.01%, componentlink1description=Datasheet, componentlink1url=https://www.vishay.com/docs/53080/p2tc.pdf, componentlink2description="DigiKey Link", componentlink2url=https://www.digikey.com/en/products/detail/vishay-sfernice/P2TC0402D1002LNTA/11657715, Composition="Thin Film", Features="Anti-Sulfur, Moisture Resistant", Height - Seated (Max)="0.025\" (0.63mm)", lastupdated="2022/9/14 8:01:18", Lifecycle Status=Active, Minimum Order=1, Number of Terminations=2, Package / Case="0402 (1005 Metric)", packaging=TapeAndReel, Part Number=P2TC0402D1002LNTA, Part Status=Active, partid=59061, Price=13.14, Resistance="10 kOhms", series=P2TC, Size / Dimension="0.039\" L x 0.024\" W (1.00mm x 0.60mm)", Supplier 1=DigiKey
R7 R8: library part RN73R1ETTP5101B25, "RES 5.1K OHM 0.1% 1/16W 0402", Device Package="0402 (1005 Metric)", manufacturer="KOA Speer Electronics, Inc.", Operating Temperature="-55°C ~ 155°C", Power (Watts)="0.063W, 1/16W", Ratings=AEC-Q200, Supplier Device Package=0402, Supplier Part Number 1=2019-RN73R1ETTP5101B25CT-ND, Temperature Coefficient=±25ppm/°C, Tolerance=±0.1%, componentlink1description=Datasheet, componentlink1url=//media.digikey.com/pdf/Data%20Sheets/KOA%20Speer/RN73R_Type_DS.pdf, componentlink2description="DigiKey Link", componentlink2url=https://www.digikey.com/en/products/detail/koa-speer-electronics-inc/RN73R1ETTP5101B25/9991854, Composition="Thin Film", Features="Automotive AEC-Q200, Moisture Resistant", Height - Seated (Max)="0.016\" (0.40mm)", lastupdated="2022/9/14 8:02:23", Lifecycle Status=Active, Minimum Order=1, Number of Terminations=2, Package / Case="0402 (1005 Metric)", packaging=TapeAndReel, Part Number=RN73R1ETTP5101B25, Part Status=Active, partid=5343, Price=0.06, Resistance="5.1 kOhms", series=RN73R, Size / Dimension="0.039\" L x 0.020\" W (1.00mm x 0.50mm)", Supplier 1=DigiKey
R9 R10: library part RP73PF1E10KBTD, "RES 10K OHM 0.1% 1/10W 0402", Device Package="0402 (1005 Metric)", manufacturer="TE Connectivity Passive Product", Operating Temperature="-55°C ~ 155°C", Power (Watts)="0.1W, 1/10W", Supplier Device Package=0402, Supplier Part Number 1=A127415CT-ND, Temperature Coefficient=±25ppm/°C, Tolerance=±0.1%, componentlink1description=Datasheet, componentlink1url=https://www.te.com/commerce/DocumentDelivery/DDEController?Action=srchrtrv&DocNm=1773272&DocType=DS&DocLang=English, componentlink2description="DigiKey Link", componentlink2url=https://www.digikey.com/en/products/detail/te-connectivity-passive-product/RP73PF1E10KBTD/8260957, Composition="Thin Film", Height - Seated (Max)="0.014\" (0.35mm)", lastupdated="2022/9/14 8:02:33", Lifecycle Status=Active, Minimum Order=1, Number of Terminations=2, Package / Case="0402 (1005 Metric)", packaging=TapeAndReel, Part Number=RP73PF1E10KBTD, Part Status=Active, partid=2434, Price=0.09, Resistance="10 kOhms", series="RP73, Holsworthy", Size / Dimension="0.039\" L x 0.020\" W (1.00mm x 0.50mm)", Supplier 1=DigiKey
R11: library part RNCF0402TKY1K00, "RES 1K OHM 0.01% 1/16W 0402", Device Package="0402 (1005 Metric)", manufacturer="Stackpole Electronics Inc", Operating Temperature="-55°C ~ 155°C", Power (Watts)="0.063W, 1/16W", Ratings=AEC-Q200, Supplier Device Package=0402, Supplier Part Number 1=RNCF0402TKY1K00CT-ND, Temperature Coefficient=±5ppm/°C, Tolerance=±0.01%, componentlink1description=Datasheet, componentlink1url=https://www.seielect.com/catalog/sei-rncf.pdf, componentlink2description="DigiKey Link", componentlink2url=https://www.digikey.com/en/products/detail/stackpole-electronics-inc/RNCF0402TKY1K00/5432231, Composition="Thin Film", Features="Automotive AEC-Q200", Height - Seated (Max)="0.014\" (0.35mm)", lastupdated="2022/9/14 8:01:36", Lifecycle Status=Active, Minimum Order=1, Number of Terminations=2, Package / Case="0402 (1005 Metric)", packaging=TapeAndReel, Part Number=RNCF0402TKY1K00, Part Status=Active, partid=20099, Price=0.88, Resistance="1 kOhms", series=RNCF, Size / Dimension="0.039\" L x 0.020\" W (1.00mm x 0.50mm)", Supplier 1=DigiKey
U1 U4: library part AMS1117, "Sot223/Pkg 1-Amp 5-Volt Low Drop Out Voltage Regulatator", Package=None, Availability=Unavailable, MF="{'manufacturer': u'Advanced Monolithic Systems'}", MP=AMS1117, Price=None
J1: LatestRevisionDate=17-Jul-2002, LatestRevisionNote="Re-released for DXP Platform.", Publisher="Altium Limited"

## Via types
v1: diameter 17.72, hole 7.87, Top Layer to Bottom Layer, tented both sides, 107 vias
v2: diameter 26.38, hole 26.38, Top Layer to Bottom Layer, 2 vias

## Nets (pads, with @x,y where several pads share a name; then routed paths per layer and width w, separated by ;. In a path a pad name is that pad's centre, name@x,y a point inside that pad or via, vN(x,y) a via of type N, cw(c..) or ccw(c..) an arc to the next point about the centre after c; other vN are vias at no path point)
1V8: C1.1 C4.1 J2.36 P1.1 Q1.1 R3.1 R4.1 R5.1 R6.1 U1.2 | length 2737.1
  Top Layer w6: v1(469,1171) 470.23,1169.77 470.23,1158.83 543.87,1085.19 544.01,1085.19 577.86,1051.34 577.86,1041.14 590.78,1028.22 621.66,1028.22 J2.36
  Top Layer w10: U1.2 600.46,475 634.31,508.86 681.07,508.86 687.4,515.19 Q1.1
  Top Layer w20: P1.1@57.72,1275 57.72,1365.05 C1.1 ; v1(60,796) v1(60,820.2) v1(60,844.41) ; R4.1 84.41,870 R5.1@80,874.41 ; C4.1 312,410 377,475 U1.2 ; v1(60,844.41) 60,854.41 R5.1@80,874.41 ; v1(60,844.41) 30,874.41 R3.1 R5.1 R5.1@80,874.41
  Top Layer w30: v1(210,440) v1(225,425) v1(240,410) C4.1
  Int2 (PWR) w30: v1@57.72,1285 v1@57.72,1350 ; v1(60,1285) 57.72,1282.72 57.72,924.22 60,921.94 ; v1(60,1355) 217.92,1355 381.11,1191.81 386.11,1191.81 401.81,1176.11 401.81,1171.11 401.92,1171 v1(469,1171) ; v1@140.67,919.76 62.18,919.76 60,921.94 ; v1(240,410) v1(225,425) v1(210,440) 60,590 v1(60,796) v1(60,820.2) v1(60,844.41) 60,921.94
  other v1: 137.36,920 60,1305 60,1330
3V3: C2.1 C3.1 C6.1 D1.1 D2.1 J4.4 P1.24 P3.2 U1.3 U4.2 U4.4 | length 1261.1
  Top Layer w15: v1(200,1290) 200,1273.85 202.58,1271.27 241,1271.27 243.58,1273.85 v1(243.58,1286.95) ; v1(265,1378) 254.31,1388.69 236.95,1388.69 232.64,1393 236.95,1397.31 259.31,1397.31 v1(265,1403) ; C3.1 464.06,570 500,534.06 U1.3
  Top Layer w20: v1(1109,820) C2.1 ; U4.4 1194.41,300 1234.41,260 D2.1@1237.36,260 ; J4.4@1070,879.7 J4.4 1072.13,889.38 1088.16,905.41 1088.16,918.16 v1(1090,920) v1(1070,920) J4.4@1070,879.7
  Top Layer w35: C6.1 U4.2 U4.4
  Top Layer w40: P3.2 1125.91,225.91 1125.91,294.21 U4.4
  other v1: 819.15,300 930,300 960,300 990,300 1020,300 1050,300 1080,300 370,570 395.69,570 420,570
5V: C5.1 J2.74 J3.A4B9 J3.B4A9 P3.1 U4.3 | length 3871.4
  Top Layer w15: J3.A4B9 387.85,309.47 387.85,276.49 v1(410,254.34) v1(410,213) ; J3.B4A9 576.46,366.46 v1(580,370)
  Top Layer w20: J2.74 640.98,1399.33 661.65,1420 v1(700,1420) v1(730,1420) v1(760,1420) v1(790,1420) v1(820,1420) ; C5.1 840.8,237.32 852.52,225.61 852.52,218.15 860.83,209.84 U4.3
  Top Layer w40: U4.3 872.4,209.84 890,192.24 P3.1
  Int2 (PWR) w40: v1(410,237.17) v1(410,213) 423,200 580,200 652.59,200 ; 580,204 580,211.76 540,251.76 540,310 580,350 v1(580,370) ; 655.42,197.17 762.59,90 P3.1 960,160 1420,160 1539.31,279.31 1539.31,750.69 1344.13,945.87 1344.13,1315.87 1240,1420 v1(820,1420) v1(790,1420) v1(760,1420) v1(730,1420) v1(700,1420)
  other v1: 575,355
AP-RESET: J2.2 Q1.2 | length 167.3
  Top Layer w10: Q1.2 612.6,689.76 613.5,690.67 J2.2
CC1_1: J3.A5 R7.2 | length 404
  Top Layer w3.5: J3.A5 430.79,264.21 440,255 530,255 584.75,200.25 626.53,200.25 681.28,145.5 681.28,134.31 710,105.59 R7.2
CC2_1: J3.B5 R8.2 | length 229.4
  Top Layer w3.5: J3.B5 548.9,268.67 604.93,212.64 R8.2
CPUX-RX: J2.58 P4.5 | length 1182.8
  Top Layer w3.5: J2.58 626.42,1240 v1(675,1240)
  Bottom Layer w3.5: v1(675,1240) 765,1240 850,1155 850,625 875,600 1125,600 P4.5
CPUX-TX: J2.60 R11.1 | length 1146.8
  Top Layer w3.5: J2.60 628.72,1265.69 674.69,1265.69 v1(676,1267) ; v1(876,627) 879.85,627 886.79,620.06 1172.3,620.06 R11.1
  Bottom Layer w3.5: v1(676,1267) 773,1267 876,1164 v1(876,627)
GND: C1.2 C2.2 C3.2 C4.2 C5.2 C6.2 J1.1 J2.41 J2.47 J2.53 J2.59 J3.A1B12 J3.B1A12 J3.S1 J3.S2 J3.S3 J3.S4 J4.6 J4.MP1 J4.MP2 J4.MP3 J4.MP4 P1.6 P1.9 P1.12 P1.14 P1.17 P1.20 P1.23 P3.3 R7.1 R8.1 R10.2 U1.1 U4.1 | length 2849.5
  Top Layer w6: P1.9 64.39,1113.91 107.12,1113.91 v1(107.24,1114.04) ; P1.6 64.34,1172.92 107.92,1172.92 v1(108,1173) ; v1@167.6,1088.39 v1@167.6,1088.9 ; 178.96,1077 175.87,1073.91 175.87,1047.12 179.68,1043.31 214.19,1043.31 216.18,1041.32 240.78,1041.32 240.78,1034.13 ; 240.78,1034.12 240.78,997.93 240.78,870.25 274.44,836.58 475.56,836.58 523.42,884.44 523.42,974.44 541.19,992.21 587.56,992.21 ; v1(274.59,1074.53) 265.01,1064.95 267.61,1062.35 267.61,1023.01 267.61,1009.04 267.61,881.36 285.56,863.42 464.44,863.42 496.58,895.56 496.58,985.56 530.07,1019.05 542.05,1019.05 v1(561,1038)
  Top Layer w13.83: C2.2 1177.43,824.89 1177.43,847.08 1158.75,865.76 J4.6 ; J4.6 1160,878.82 J4.6@1160,890.63 ; J4.6 J4.6@1158.75,889.38 ; J4.6@1158.75,889.38 J4.6@1160,890.63 ; J4.6@1158.75,889.38 1140,908.13 v1(1140,920) v1(1160,920) ; J4.6@1160,890.63 v1(1160,920) ; J4.6@1160,890.63 1180,910.63 v1(1180,920) v1(1160,920)
  Top Layer w15: v1(166.32,1088.9) 167.05,1088.9 178.96,1077 219.38,1077 P1.14@221.85,1074.53 ; v1@167.6,1088.9 167.6,1089.64 166.32,1090.92 v1(166.32,1120.17) 167.05,1120.17 177.78,1130.89 219.16,1130.89 P1.17 221.85,1133.58 v1(274.59,1133.58) J2.47 328.92,1135.18 361.21,1135.18 375,1148.97 375,1177.25 361.21,1191.04 ; 179,1136.05 171.37,1143.68 171.37,1143.93 168.46,1146.84 168.46,1148.31 167.27,1149.51 167.27,1175.32 166.75,1175.84 166.75,1176.58 171.37,1181.2 171.37,1182.32 179,1189.95 219.16,1189.95 P1.20 221.85,1192.64 J2.53 328.92,1194.23 361.21,1194.23 377,1210.03 v1(377,1246) 372.9,1250.1 J2.59@350.33,1250.1 ; 179,1195.11 171.37,1202.73 171.37,1202.82 167.82,1206.37 167.82,1207.84 167.05,1208.61 167.05,1237.43 166.53,1237.95 167.27,1237.95 178.33,1249 219.16,1249 221.85,1251.69 v1(274.59,1251.69) J2.59 ; P1.14@192.45,1074.42 P1.14 P1.14@221.85,1074.53 ; 361.21,1131.99 364.55,1128.64 366.17,1128.64 372.94,1121.87 v1(373.67,1121.87) 373.67,1084.56 370.38,1081.26 v1(370.38,1080.52) 369.64,1080.52 365.24,1076.12 328.92,1076.12 J2.41 v1(274.59,1074.53) P1.14@221.85,1074.53
  other v1: 275,890 275,925 27.75,963.56 275,965 574,969 1300,1000 28.39,1034.24 450,1100 166.32,1147.58 375,1160 166.32,1175.84 274.59,1192.64 500,1200 900,1200 1000,1200 1100,1200 1200,1200 1300,1200 1400,1200 1500,1200 166.32,1207.11 166.32,1237.95 150,1300 450,1300 850,1300 950,1300 1050,1300 1150,1300 1450,1300 400,1400 500,1400 1400,1400
GPADC0: J2.67
LCD_SPI_RST: J2.68
LINEOUTP: J2.65
MCSI-CK_N: J2.45 P1.16 | length 108.2
  Top Layer w6.2: P1.16 224.87,1110.65 324.08,1110.65 J2.45
MCSI-CK_P: J2.43 P1.15 | length 111.2
  Top Layer w6.2: P1.15 228.6,1100.96 320.58,1100.96 J2.43
MCSI-D0_N: J2.57 P1.22 | length 108.3
  Top Layer w6.2: P1.22 224.98,1228.65 323.97,1228.65 J2.57
MCSI-D0_P: J2.55 P1.21 | length 111.1
  Top Layer w6.2: P1.21 228.48,1218.96 320.26,1218.96 326.9,1212.32 J2.55
MCSI-D1_N: J2.49 P1.18 | length 111.1
  Top Layer w6.2: P1.18 228.48,1159.9 320.69,1159.9 J2.49
MCSI-D1_P: J2.51 P1.19 | length 108.3
  Top Layer w6.2: P1.19 224.98,1169.6 323.97,1169.6 J2.51
MCSI-MCLK: J2.34 P1.13 | length 708.5
  Top Layer w13.83: P1.13 252.2,1054.73 254.19,1052.74 254.19,1028.57 254.19,1003.49 254.19,875.81 280,850 470,850 510,890 510,980 535.63,1005.63 J2.34
MCSI-PWDN: J2.26 P1.2 R4.2 | length 1086.8
  Top Layer w3.5: P1.2 65.84,1250 v1(135,1250) ; v1(133.03,1202.04) 133.03,1041.97 160,1015 160,985 110,935 110,897.05 112.05,895 170,895 179.99,885.01 179.99,872.65 R4.2 205,870 265,810 485,810 550,875 550,915 561.89,926.89 J2.26
  Bottom Layer w3.5: v1(133.03,1202.04) 134.02,1203.02 134.02,1249.02 v1(135,1250)
MCSI-RSTN: J2.28 P1.3 R6.2 | length 982.7
  Top Layer w3.5: P1.3 66.16,1230 135,1230 150,1215 150,1040 182.64,1007.36 R6.2 220,920 230,910 230,865 270,825 480,825 535,880 535,920 561.58,946.58 J2.28
MICIN1N: J2.63
MICIN1P: J2.61
NetD1_2: D1.2 R9.1 | length 50
  Top Layer w10: D1.2@187.36,1390 R9.1@187.36,1440
NetD2_2: D2.2 R10.1 | length 50
  Top Layer w5: R10.1 D2.2@1282.64,260
PF0: J2.24 J4.8 | length 770.5
  Top Layer w13.83: J2.24 625.58,908.22 666.9,908.22 675,916.32 675,956 723.72,1004.72 1175.28,1004.72 1238.5,941.5 1238.5,884.43 J4.8
PF1: J2.22 J4.7 | length 719.1
  Top Layer w13.83: J2.22 625.58,888.53 688.53,888.53 705.08,905.08 705.08,945.08 746.1,986.1 1148.9,986.1 1202.06,932.94 J4.7
PF2: J2.6 J4.5 | length 558.9
  Top Layer w13.83: J2.6 625.58,731.05 653.64,731.05 654.99,732.39 682.39,732.39 730,780 845,780 895,830 1079.68,830 1115.44,865.76 J4.5
PF3: J2.20 J4.3 | length 495.2
  Top Layer w13.83: J2.20 625.58,866.82 653.64,866.82 655.35,865.12 792.81,865.12 798.92,871.22 798.92,898.92 840,940 995,940 1022.61,912.39 1022.61,883.79 J4.3
PF4: J2.10 J4.2 | length 442.6
  Top Layer w13.83: J2.10 690.16,835 805,835 883.57,913.57 961.43,913.57 978.66,896.34 978.66,884.43 J4.2
PF5: J2.8 J4.1 | length 372.8
  Top Layer w13.83: J2.8 625.58,750.73 657.04,750.73 711.31,805 825,805 886.86,866.86 935.35,866.86 942.21,873.73 J4.1
PF6: J2.4 J4.CD1 | length 753.2
  Top Layer w13.83: J2.4 625.58,711.36 653.64,711.36 656,713.72 698.72,713.72 740,755 870,755 905,790 1235,790 1285.09,840.09 1285.09,873.99 J4.CD1
PG0: J2.48
PG1: J2.46
PG2: J2.44
PG3: J2.42
PG4: J2.38
PG5: J2.40
PG6: J2.32 P3.6 | length 1587.4
  Top Layer w3.5: J2.32 649.17,985.95 682,1018.77 v1(682,1019)
  Bottom Layer w3.5: v1(682,1019) 725,976 725,523.4 788.4,460 1290,460 1390,360 P3.6
PG7: J2.30 P3.5 | length 1563.5
  Top Layer w3.5: J2.30 627.88,969.58 652.49,969.58 677.91,995 v1(681,995)
  Bottom Layer w3.5: v1(681,995) 705,971 705,510 780,435 1265,435 1355,345 1355,155 P3.5
PH0: J2.69
PH1: J2.71
PH2: J2.73
PH3: J2.75
PH4: J2.70
PH6: J2.66
PH7: J2.64
PH8: J2.62
PH11: J2.56 P4.2 | length 910.7
  Top Layer w3.5: J2.56 627.73,1219 v1(697,1219)
  Bottom Layer w3.5: v1(697,1219) 698,1220 745,1220 775,1190 775,600 808.88,566.12 838.88,566.12 845,560 868.62,536.38 888.62,536.38 P4.2
PH12: J2.54 P4.1 | length 813.4
  Top Layer w3.5: J2.54 628.72,1198.32 674.68,1198.32 v1(677,1196)
  Bottom Layer w3.5: v1(677,1196) 739,1196 750,1185 750,575 P4.1
PH13: J2.52 P4.4 | length 1050.5
  Top Layer w3.5: J2.52 649.17,1182.8 653.33,1178.64 653.33,1177.05 655.38,1175 790,1175 v1(815,1150)
  Bottom Layer w3.5: v1(815,1150) 825,1140 825,625 865,585 1000,585 1060,525 P4.4
PH14: J2.50 P4.3 R9.2 | length 1495.3
  Top Layer w3.5: R9.2 234.64,1445 v1(272,1445) ; v1(550,1299.19) 550,1210 592.73,1167.27 620.41,1167.27 J2.50 649.17,1163.11 653.33,1158.95 653.33,1158.05 655.38,1156 765,1156 799.02,1121.98 799.02,1110.98 v1(800,1110)
  Bottom Layer w3.5: v1(272,1445) 272,1438 284,1426 423.19,1426 v1(550,1299.19) ; v1(800,1110) 800,625 850,575 910,575 960,525 P4.3
PI1: J2.35 P1.4 R3.2 | length 673.5
  Top Layer w3.5: v1(23,991) v1@17.96,991 ; R3.2 30,925.59 19.94,935.65 16.99,935.65 9.87,942.76 9.87,981.7 17.96,989.79 v1@17.96,991 ; P1.4 63.74,1211.69 21.69,1211.69 9.87,1199.87 9.87,1000.3 17.96,992.21 v1@17.96,991 ; v1(284.47,1016.03) 326.77,1016.03 J2.35
  Bottom Layer w3.5: v1(23,991) 99.72,991 124.75,1016.03 v1(284.47,1016.03)
PI2: J2.33 P1.5 R5.2 | length 546
  Top Layer w3.5: P1.5 67.43,1189.36 117.95,1189.36 124.56,1182.75 124.56,1005.44 v1(135,995) 80.6,940.6 80.6,923.24 R5.2 ; v1(284.92,992.82) 324.36,992.82 J2.33
  Bottom Layer w3.5: v1(135,995) 136.09,993.91 283.83,993.91 v1(284.92,992.82)
RST: P3.4 Q1.3 | length 1047.9
  Top Layer w3.5: Q1.3 650.15,465 v1(685,465)
  Bottom Layer w3.5: v1(685,465) 720,465 775,410 1247.95,410 1250,407.95 1250,405 1320,335 1320,180 1295,155 1255,155 P3.4
UART0_TX: P4.6 R11.2 | length 116.7
  Top Layer w3.5: R11.2 1230.59,610 1240.65,599.94 1240.65,584.35 P4.6
USB0__N: J2.37 R1.1 | length 86.3
  Top Layer w8.56: J2.37 328.08,1034.4 375.24,1034.4 v1(376,1033.64)
  Bottom Layer w8.56: v1(376,1033.64) 377.75,1031.89 392.52,1031.89 404.41,1020 R1.1
USB0__P: J2.39 R2.1 | length 86.3
  Top Layer w8.56: J2.39 328.08,1055.6 375.24,1055.6 v1(376,1056.36)
  Bottom Layer w8.56: v1(376,1056.36) 377.75,1058.11 392.52,1058.11 404.41,1070 R2.1
USB0_N: J3.A7 J3.B7 R1.2 | length 942.2
  Top Layer w8.56: v1(449,384) 450.75,382.25 450.75,374.27 453.58,371.44 453.58,362.53 453.53,362.49 453.53,349.77 452.1,348.33 J3.B7@452.1,312.16 ; J3.B7 J3.B7@452.1,312.16 ; J3.A7 488.22,312.16 488.22,289.52 483.85,285.14 483.85,282.01 479.24,277.41 461.08,277.41 456.47,282.01 456.47,285.14 452.1,289.52 J3.B7@452.1,312.16
  Bottom Layer w8.56: v1(449,384) 450.75,385.75 450.75,393.73 453.58,396.56 453.58,678.58 535,760 535,958.92 535,983.67 535,1014.86 534.84,1014.86 534.84,1018.38 515,1038.22 470.86,1038.22 R1.2
USB0_P: J3.A6 J3.B6 R2.2 | length 940.9
  Top Layer w8.56: J3.A6 J3.A6@470.16,336.42 ; v1(471.72,384) 469.97,382.25 469.97,374.27 467.14,371.44 467.14,356.91 467.1,356.87 467.1,349.77 468.53,348.33 468.53,338.04 J3.A6@470.16,336.42 ; J3.B6 509.53,336.42 503.53,342.41 503.53,345.55 498.97,350.11 480.71,350.11 476.15,345.55 476.15,342.41 J3.A6@470.16,336.42
  Bottom Layer w8.56: R2.2 470.86,1051.78 520.62,1051.78 548.41,1024 548.41,1017.93 548.56,1017.77 548.56,754.38 467.14,672.96 467.14,396.56 469.97,393.73 469.97,385.75 v1(471.72,384)
V831_LCD_CLK: J2.7
V831_LCD_D3: J2.31
V831_LCD_D4: J2.29
V831_LCD_D5: J2.27
V831_LCD_D6: J2.25
V831_LCD_D7: J2.23
V831_LCD_D10: J2.21
V831_LCD_D11: J2.11
V831_LCD_D12: J2.9
V831_LCD_DE: J2.5
V831_LCD_HSYNC: J2.3
V831_LCD_VSYNC: J2.1
pads on no net: "J2. " J2.72 J2.SH1 J2.SH2 J3. J3.A8 J3.B8 J4. P1.7 P1.8 P1.10 P1.11
copper on no net:
  other v2: 93.79,1017.33 93.79,1308.67

## Polygon pours and split planes (outlines as drawn)
GND on Int1 (GND) "GND_L02_P000" (solid, pour order 0): 0.25,197.1 0.25,1291.59 cw(c197.1,1291.59) 197.1,1488.44 1370.33,1488.44 cw(c1370.33,1291.59) 1567.18,1291.59 1567.18,197.1 cw(c1370.33,197.1) 1370.33,0.25 197.1,0.25 cw(c197.1,197.1)
3V3 on Int2 (PWR) "3V3_L03_P001" (solid, pour order 1): 0.25,197.1 0.25,1291.59 cw(c197.1,1291.59) 197.1,1488.44 1370.33,1488.44 cw(c1370.33,1291.59) 1567.18,1291.59 1567.18,197.1 cw(c1370.33,197.1) 1370.33,0.25 197.1,0.25 cw(c197.1,197.1)
GND on Top Layer "GND_L01_P004" (solid, pour order 4): 0.25,197.1 0.25,1291.59 cw(c197.1,1291.59) 197.1,1488.44 1370.33,1488.44 cw(c1370.33,1291.59) 1567.18,1291.59 1567.18,197.1 cw(c1370.33,197.1) 1370.33,0.25 197.1,0.25 cw(c197.1,197.1)
GND on Bottom Layer "GND_L04_P005" (solid, pour order 5): 0.25,197.1 0.25,1291.59 cw(c197.1,1291.59) 197.1,1488.44 1370.33,1488.44 cw(c1370.33,1291.59) 1567.18,1291.59 1567.18,197.1 cw(c1370.33,197.1) 1370.33,0.25 197.1,0.25 cw(c197.1,197.1)

## Keep-outs
Keep-Out Layer:
  region: 895,1123 1287,1123 1287,1030 895,1030

## Silkscreen, mask and mechanical layers (free items; w line width, h text height)
Mechanical 1:
  lines w0.5: 275.84,1488.44 1291.59,1488.44 ; 0.25,197.1 ccw(c197.1,197.1) 197.1,0.25 1370.33,0.25 ccw(c1370.33,197.1) 1567.18,197.1 1567.18,1291.59 ccw(c1370.33,1291.59) 1370.33,1488.44 197.1,1488.44 ccw(c197.1,1291.59) 0.25,1291.59 0.25,197.1

## Text inside footprints (layer, text, board x,y; h text height)
J2: Mechanical 9 "NGFF-67P_B" at 505.47,1005.63 h20 r90; Mechanical 8 "38" at 592.57,1073.74 h20 r90; Mechanical 8 "36" at 592.57,1054.06 h20 r90; Mechanical 8 "28" at 592.57,975.32 h20 r90; Mechanical 8 "22" at 592.57,916.26 h20 r90; Mechanical 8 "20" at 592.57,896.58 h20 r90; Mechanical 8 "40" at 592.57,1093.42 h20 r90; Mechanical 8 "21" at 295.32,906.42 h20 r90; Mechanical 8 "23" at 295.32,926.1 h20 r90; Mechanical 8 "25" at 295.32,945.79 h20 r90; Mechanical 8 "27" at 295.32,965.47 h20 r90; Mechanical 8 "44" at 592.57,1132.8 h20 r90; Mechanical 8 "26" at 592.57,955.63 h20 r90; Mechanical 8 "24" at 592.57,935.95 h20 r90; Mechanical 8 "46" at 592.57,1152.48 h20 r90; Mechanical 8 "74" at 592.57,1428.07 h20 r90; Mechanical 8 "72" at 592.57,1408.39 h20 r90; Mechanical 8 "34" at 592.57,1034.37 h20 r90; Mechanical 8 "32" at 592.57,1014.68 h20 r90; Mechanical 8 "75" at 295.32,1437.91 h20 r90; Mechanical 8 "73" at 295.32,1418.23 h20 r90; Mechanical 8 "4" at 608.57,719.41 h20 r90; Mechanical 8 "1" at 311.32,689.88 h20 r90; Mechanical 8 "3" at 311.32,709.57 h20 r90; Mechanical 8 "2" at 608.57,699.72 h20 r90; Mechanical 8 "69" at 295.32,1378.86 h20 r90; Mechanical 8 "71" at 295.32,1398.54 h20 r90; Mechanical 8 "56" at 592.57,1250.91 h20 r90; Mechanical 8 "58" at 592.57,1270.59 h20 r90; Mechanical 8 "70" at 592.57,1388.7 h20 r90; Mechanical 8 "54" at 592.57,1231.22 h20 r90; Mechanical 8 "48" at 592.57,1172.16 h20 r90; Mechanical 8 "50" at 592.57,1191.85 h20 r90; Mechanical 8 "62" at 592.57,1309.96 h20 r90; Mechanical 8 "60" at 592.57,1290.28 h20 r90; Mechanical 8 "66" at 592.57,1349.33 h20 r90; Mechanical 8 "64" at 592.57,1329.65 h20 r90; Mechanical 8 "52" at 592.57,1211.54 h20 r90; Mechanical 8 "68" at 592.57,1369.02 h20 r90; Mechanical 8 "53" at 295.32,1221.38 h20 r90; Mechanical 8 "55" at 295.32,1241.06 h20 r90; Mechanical 8 "59" at 295.32,1280.43 h20 r90; Mechanical 8 "57" at 295.32,1260.75 h20 r90; Mechanical 8 "63" at 295.32,1319.8 h20 r90; Mechanical 8 "61" at 295.32,1300.12 h20 r90; Mechanical 8 "65" at 295.32,1339.49 h20 r90; Mechanical 8 "67" at 295.32,1359.17 h20 r90; Mechanical 8 "41" at 295.32,1103.27 h20 r90; Mechanical 8 "43" at 295.32,1122.95 h20 r90; Mechanical 8 "45" at 295.32,1142.64 h20 r90; Mechanical 8 "47" at 295.32,1162.32 h20 r90; Mechanical 8 "29" at 295.32,985.16 h20 r90; Mechanical 8 "42" at 592.57,1113.11 h20 r90; Mechanical 8 "35" at 295.32,1044.21 h20 r90; Mechanical 8 "33" at 295.32,1024.53 h20 r90; Mechanical 8 "49" at 295.32,1182.01 h20 r90; Mechanical 8 "SH2" at 309.83,1481.22 h20 r90; Mechanical 8 "5" at 311.32,729.25 h20 r90; Mechanical 8 "7" at 311.32,748.94 h20 r90; Mechanical 8 "8" at 608.57,758.78 h20 r90; Mechanical 8 "6" at 608.57,739.09 h20 r90; Mechanical 8 "SH1" at 309.83,666.26 h20 r90; Mechanical 8 "10" at 592.57,778.47 h20 r90; Mechanical 8 "30" at 592.57,995 h20 r90; Mechanical 8 "37" at 295.32,1063.9 h20 r90; Mechanical 8 "39" at 295.32,1083.58 h20 r90; Mechanical 8 "51" at 295.32,1201.69 h20 r90; Mechanical 8 "31" at 295.32,1004.84 h20 r90; Mechanical 8 "9" at 311.32,768.62 h20 r90; Mechanical 8 "11" at 295.32,788.31 h20 r90
P3: Top Overlay "6" at 1465,75 h40; Top Overlay "+" at 800,110 h40 r180
P4: Top Overlay "1" at 725,595 h40; Top Overlay "6" at 1380,505 h40